# Altium PCB hic v1.0.0.PcbDoc (part 2 of 2)
Units mm, origin at the board's own origin, x right, y up, seen from the top; angles counter-clockwise.
Board outline 54.61 x 86.36 mm, 4 copper layers (Top Layer, GND, PWR, Bottom Layer); 173 components, 96 nets, 602 pads, 171 vias.
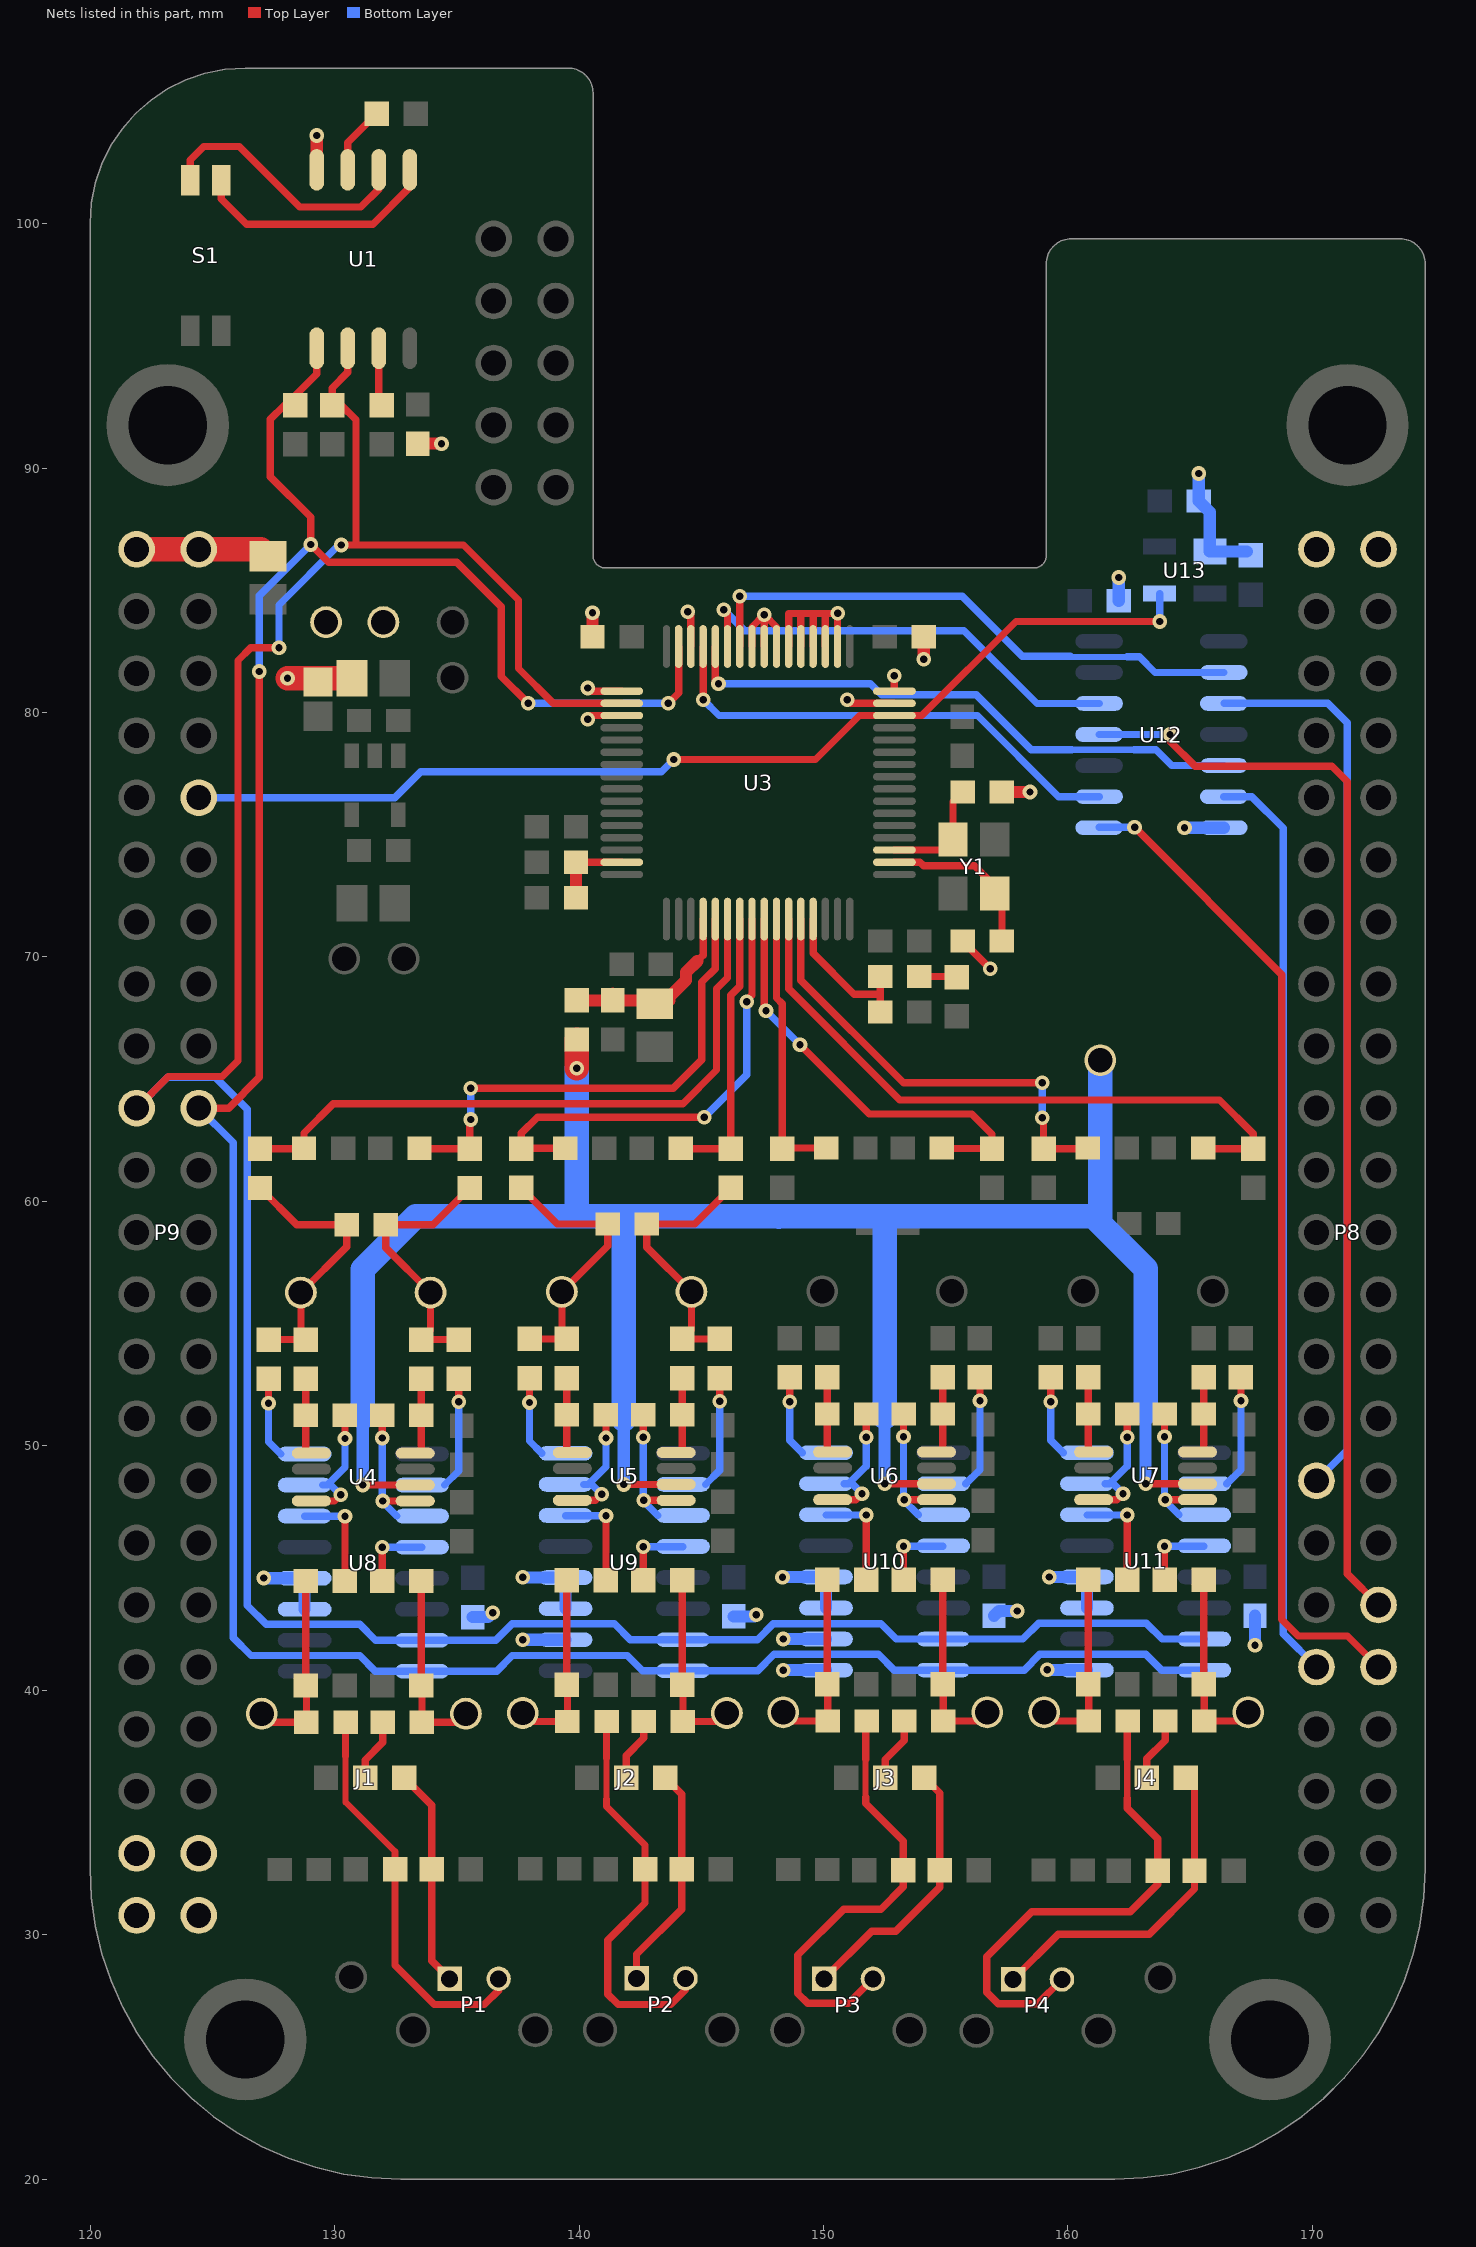
[diagram p4: the nets of this part, all layers, seen from the top]

## Via types
v1: diameter 0.6, hole 0.3, Top Layer to Bottom Layer, 168 vias
v2: diameter 0.6, hole 0.3, Top Layer to Bottom Layer, tented both sides, 3 vias

## Nets (pads, with @x,y where several pads share a name; then routed paths per layer and width w, separated by ;. In a path a pad name is that pad's centre, name@x,y a point inside that pad or via, vN(x,y) a via of type N, cw(c..) or ccw(c..) an arc to the next point about the centre after c; other vN are vias at no path point) (continued)
CHAN3.N: C30.1 R9.1 R19.2 R20.2 TP9.1 | length 11
  Top Layer w0.3: R9.1@137.636,60.552 139.113,59.075 C30.1@141.175,59.075 141.175,58.175 TP9.1@139.3,56.3 R20.2@139.3,54.575 ; R19.2@137.975,54.375 R20.2@139.5,54.375
CHAN3.P: C30.2 R10.1 R21.2 R22.2 TP10.1 | length 10.7
  Top Layer w0.3: R21.2@144.225,54.375 R22.2@145.75,54.375 ; R21.2@144.6,54.75 TP10.1@144.6,56.3 142.775,58.125 C30.2@142.775,59.075 144.734,59.075 R10.1@146.211,60.552
CHAN4.N: C29.1 R7.1 R15.2 R16.2 TP7.1 | length 11
  Top Layer w0.3: R7.1@126.95,60.55 128.45,59.05 C29.1@130.5,59.05 130.5,58.15 TP7.1@128.625,56.275 R16.2@128.625,54.55 ; R15.2@127.3,54.35 R16.2@128.825,54.35
CHAN4.P: C29.2 R8.1 R17.2 R18.2 TP8.1 | length 10.7
  Top Layer w0.3: R17.2@133.55,54.35 R18.2@135.075,54.35 ; R17.2@133.925,54.725 TP8.1@133.925,56.275 132.1,58.1 C29.2@132.1,59.05 134.025,59.05 R8.1@135.525,60.55
CM_BIAS: R6.2 TP25.1 U4.2 U5.2 U6.2 U7.2 | length 95.7
  Top Layer w0.3: v1(131.15,48.4) U4.2@133.3,48.4 ; v1(141.825,48.425) U5.2@143.975,48.425 ; v1(152.5,48.45) U6.2@154.625,48.45 ; v1(163.175,48.45) U7.2@165.3,48.45
  Top Layer w1: v1(139.9,65.45) R6.2@139.9,66.625
  Bottom Layer w0.5: v1(131.15,48.4) 131.15,51.175 ; v1(141.825,48.425) 141.825,51.075 ; v1(152.5,48.45) 152.5,51.175 ; v1(163.175,48.45) 163.175,51.35
  Bottom Layer w1: 131.15,51.175 131.15,57.225 133.325,59.4 148.15,59.4 ; 139.9,59.4 v1(139.9,65.45) ; 141.825,51.075 141.825,59.35 ; 148.175,59.375 148.15,59.4 ; 152.5,51.175 152.5,59.318 ; 161.025,59.4 163.175,57.25 163.175,51.35 ; TP25.1@161.325,65.775 161.325,59.4 148.15,59.4
DAI_ADC.BCLK: U3.28 U12.5 | length 23.6
  Top Layer w0.3: U3.28@145.575,82.7 145.575,81.304 v1(145.704,81.175)
  Bottom Layer w0.25: 160.15,78.475 162.7,78.475
  Bottom Layer w0.3: v1(145.704,81.175) 151.925,81.175 152.375,80.725 156.25,80.725 158.5,78.475 160.15,78.475 ; 162.7,78.475 163.6,78.475 164.245,77.83 U12.5@166.375,77.83
DAI_ADC.DATA1: U3.27 U12.12 | length 18.5
  Top Layer w0.3: v1(145.925,84.2) 146.075,84.05 U3.27@146.075,82.7
  Bottom Layer w0.3: v1(145.925,84.2) 146.775,83.35 155.75,83.35 158.73,80.37 U12.12@161.275,80.37
DAI_ADC.DATA2: U3.26 U12.2 | length 23.1
  Top Layer w0.3: U3.26@146.575,82.7 v1(146.575,84.75)
  Bottom Layer w0.25: 160.1,82.3 160.125,82.275 162.425,82.275
  Bottom Layer w0.3: v1(146.575,84.75) 155.675,84.75 158.125,82.3 160.1,82.3 ; 162.425,82.275 162.925,82.275 163.56,81.64 U12.2@166.375,81.64
DAI_ADC.WCLK: U3.29 U12.9 | length 20
  Top Layer w0.3: v1(145.075,80.525) U3.29@145.075,82.7
  Bottom Layer w0.3: v1(145.075,80.525) 145.725,79.875 156.3,79.875 159.615,76.56 U12.9@161.275,76.56
GND: C1.1 C2.1 C3.1 C4.2 C5.2 C9.1 C16.1 C61.1 C62.1 C63.1 C64.1 C65.1 C66.1 NT1.1 P8.1 P8.2 P9.1 P9.2 P9.43 P9.44 P9.45 P9.46 R55.1 TP1.1 TP2.1 U1.4 U3.15 U3.16 U3.18 U3.19 U3.20 U3.21 U3.22 U3.23 U3.24 U3.25 U3.30 U3.33 U3.35 U8.11 U8.12 U9.10 U9.11 U9.12 U10.9 U10.10 U10.11 U10.12 U11.9 U11.11 U11.12 U12.7 U13.1 | length 65.3
  Top Layer w0.3: v1(140.35,79.725) 140.35,79.8 140.425,79.875 U3.35@141.75,79.875 ; v1(140.35,81) 140.35,80.925 140.4,80.875 U3.33@141.75,80.875 ; v1(144.45,84.125) 144.575,84 U3.30@144.575,82.7 ; U3.25@147.075,82.7 147.075,83.5 v1(147.575,84) ; U3.24@147.575,82.7 v1(147.575,84) ; U3.23@148.075,82.7 148.075,83.5 v1(147.575,84) ; U3.22@148.575,82.7 148.575,84.047 149.075,84.047 ; U3.21@149.075,82.7 149.075,84.047 ; U3.20@149.575,82.7 149.575,84.047 ; U3.19@150.075,82.7 150.075,84.047 ; U3.18@150.575,82.7 v1@150.575,84.047 ; v1(150.582,84.054) v1@150.575,84.047 ; v1(150.975,80.525) 151.125,80.375 U3.15@152.9,80.375 ; U3.16@152.9,80.875 v1(152.9,81.5) ; C16.1@155.7,70.65 v1(156.825,69.525) ; 149.075,84.047 149.575,84.047 ; 149.575,84.047 150.075,84.047 ; 150.075,84.047 v1@150.575,84.047
  Top Layer w0.5: U1.4@129.27,102.2 v1(129.27,103.605) ; C1.1@133.4,91 v1(134.375,91) ; C2.1@140.55,83.1 v1(140.55,84.075) ; v1(154.1,82.175) C3.1@154.1,83.1 ; C9.1@157.3,76.75 v1(158.45,76.75)
  Top Layer w1: P9.1@121.905,86.675 P9.2@124.445,86.675 C4.2@126.986,86.675 ; v1(128.075,81.4) C5.2@130.714,81.4
  Bottom Layer w0.3: v1(150.582,84.054) v1@150.582,84.168
  Bottom Layer w0.5: v1(127.1,44.6) 127.11,44.59 U8.12@128.775,44.59 U8.11@128.775,43.32 ; C61.1@135.65,43 136.275,43 136.475,43.2 v1(136.475,43.175) ; v1(137.7,42.075) U9.10@139.45,42.075 ; v1(137.7,44.625) 137.71,44.615 U9.12@139.45,44.615 U9.11@139.45,43.345 ; C62.1@146.325,43.025 147.175,43.025 v1(147.25,43.1) ; v1(148.325,44.625) 148.34,44.64 U10.12@150.1,44.64 U10.11@150.1,43.37 ; v1(148.35,40.825) 148.355,40.83 U10.9@150.1,40.83 ; v1(148.35,42.1) U10.10@150.1,42.1 ; C63.1@156.975,43.05 157.175,43.25 v1(157.925,43.25) ; v1(159.15,40.85) 159.17,40.83 U11.9@160.775,40.83 ; v1(159.235,44.64) U11.12@160.775,44.64 U11.11@160.775,43.37 ; C65.1@162.075,84.575 v1(162.075,85.525) ; v1(164.765,75.29) U12.7@166.375,75.29 ; v1(165.35,89.775) C66.1@165.35,88.65 165.8,88.2 U13.1@165.8,86.585 R55.1@167.315,86.585 ; v1(167.65,41.85) C64.1@167.65,43.05
I2C2_SCL: P9.19 R3.1 U1.6 U3.34 U8.7 U9.7 U10.7 U11.7 | length 120.5
  Top Layer w0.3: P9.19@121.905,63.815 123.2,65.11 125.41,65.11 126.05,65.75 126.05,82.125 126.575,82.65 v1(127.725,82.65) ; v1(130.275,86.85) 135.275,86.85 137.525,84.6 137.525,81.8 138.95,80.375 U3.34@141.75,80.375 ; U1.6@130.54,94.9 130.54,93.915 129.9,93.275 R3.1@129.9,92.575 130.275,92.575 130.875,91.975 130.875,86.85
  Bottom Layer w0.3: P9.19@121.905,63.815 123.165,65.075 125.125,65.075 126.425,63.775 126.425,43.475 127.2,42.7 131.025,42.7 131.675,42.05 U8.7@133.575,42.05 136.6,42.05 137.275,42.725 141.45,42.725 142.1,42.075 U9.7@144.25,42.075 147.3,42.075 147.95,42.725 152.35,42.725 152.975,42.1 U10.7@154.9,42.1 158.15,42.1 158.8,42.75 163.2,42.75 163.85,42.1 U11.7@165.575,42.1 ; v1(127.725,82.65) 127.725,84.4 130.175,86.85 v1(130.275,86.85)
I2C2_SDA: P9.20 R2.1 U1.5 U3.31 U8.8 U9.8 U10.8 U11.8 | length 120.7
  Top Layer w0.3: P9.20@124.445,63.815 125.665,63.815 126.925,65.075 v1(126.925,81.675) ; R2.1@128.4,92.575 127.95,92.575 127.375,92 127.375,89.65 129.025,88 v1(129.025,86.875) 129.75,86.15 135,86.15 136.825,84.325 136.825,81.475 v1(137.925,80.375) ; R2.1@128.4,92.975 129.27,93.845 U1.5@129.27,94.9 ; v1(143.65,80.375) 144.075,80.8 U3.31@144.075,82.7
  Bottom Layer w0.3: P9.20@124.445,63.815 125.85,62.41 125.85,42.156 126.581,41.425 131.025,41.425 131.67,40.78 U8.8@133.575,40.78 136.63,40.78 137.275,41.425 141.975,41.425 142.595,40.805 U9.8@144.25,40.805 147.305,40.805 147.975,41.475 152.25,41.475 152.895,40.83 U10.8@154.9,40.83 158.205,40.83 158.85,41.475 163.185,41.475 163.83,40.83 U11.8@165.575,40.83 ; v1(126.925,81.675) 126.925,84.775 v1(129.025,86.875) ; v1(137.925,80.375) v1(143.65,80.375)
LOOP_FILTER: C17.1 C18.1 U3.61 | length 6.3
  Top Layer w0.3: U3.61@149.575,71.55 149.575,70.15 151.25,68.475 152.3,68.475 152.325,68.5 C18.1@152.325,69.2 ; C17.1@152.325,67.75 152.325,68.45
MCASP0_ACLKX: P8.37 U12.6 | length 37.8
  Bottom Layer w0.3: U12.6@166.375,76.56 167.515,76.56 168.8,75.275 168.8,42.32 P8.37@170.165,40.955
MCASP0_AXR0: P8.36 U12.11 | length 45
  Top Layer w0.3: v1@164.175,78.825 165.2,77.8 170.8,77.8 171.425,77.175 171.425,44.775 P8.36@172.705,43.495
  Bottom Layer w0.3: U12.11@161.275,79.1 v1(164.175,79.1)
MCASP0_AXR1: P8.31 U12.3 | length 36.9
  Bottom Layer w0.3: U12.3@166.38,80.375 170.625,80.375 171.425,79.575 171.425,49.835 P8.31@170.165,48.575
MCASP0_FSX: P8.38 U12.8 | length 41.1
  Top Layer w0.3: v1(162.725,75.3) 168.75,69.275 168.75,42.9 169.425,42.225 171.435,42.225 P8.38@172.705,40.955
  Bottom Layer w0.3: U12.8@161.285,75.3 v1(162.725,75.3)
MIC1.N: J3.3 P3.1 R52.2 | length 11
  Top Layer w0.3: P3.1@150.022,28.2 151.972,30.15 152.95,30.15 154.75,31.95 R52.2@154.75,32.65 154.75,35.8 J3.3@154.125,36.425
MIC1.P: C53.2 P3.2 R51.1 | length 18.1
  Top Layer w0.25: 151.725,35.625 151.725,37.175
  Top Layer w0.3: 151.725,35.625 151.725,35.375 153.262,33.838 R51.1@153.262,32.649 153.262,31.962 152.35,31.05 150.825,31.05 148.95,29.175 148.95,27.6 149.35,27.2 151.022,27.2 P3.2@152.022,28.2 ; 151.725,37.175 C53.2@151.725,38.7
MIC2.N: J4.3 P4.1 R54.2 | length 13.2
  Top Layer w0.3: P4.1@157.755,28.176 159.604,30.025 163.325,30.025 165.175,31.875 R54.2@165.175,32.625 J4.3@165.175,36.075
MIC2.P: C55.2 P4.2 R53.1 | length 20.6
  Top Layer w0.25: 162.425,35.6 162.425,37.175
  Top Layer w0.3: P4.2@159.755,28.176 158.754,27.175 157.15,27.175 156.675,27.65 156.675,29.1 158.525,30.95 162.55,30.95 163.675,32.075 R53.1@163.675,32.625 163.675,33.925 162.425,35.175 162.425,35.6 ; 162.425,37.175 162.425,38.725 C55.2@162.45,38.75
MIC3.N: J2.3 P2.1 R50.2 | length 9.3
  Top Layer w0.3: P2.1@142.354,28.218 142.354,29.204 144.2,31.05 R50.2@144.2,32.675 144.2,35.75 J2.3@143.525,36.425
MIC3.P: C51.2 P2.2 R49.1 | length 16.5
  Top Layer w0.25: 141.125,35.55 141.125,37.225
  Top Layer w0.3: 141.125,35.55 141.125,35.25 142.7,33.675 R49.1@142.7,32.675 142.7,31.3 141.175,29.775 141.175,27.575 141.6,27.15 143.75,27.15 144.354,27.754 P2.2@144.354,28.218 ; 141.125,37.225 C51.2@141.125,38.725
MIC4.N: J1.3 P1.1 R48.2 | length 9
  Top Layer w0.3: J1.3@132.85,36.425 133.975,35.3 R48.2@133.975,32.675 133.975,28.935 P1.1@134.709,28.2
MIC4.P: C49.2 P1.2 R47.1 | length 16.4
  Top Layer w0.25: 130.45,37.3 130.45,35.425 132.475,33.4
  Top Layer w0.3: 130.45,37.3 C49.2@130.45,38.7 ; 132.475,33.4 R47.1@132.475,32.675 132.475,28.75 134.075,27.15 136.125,27.15 136.709,27.734 P1.2@136.709,28.2
NetC9_2: C9.2 U3.3 Y1.1 | length 4.7
  Top Layer w0.3: U3.3@152.9,74.375 154.875,74.375 Y1.1@155.3,74.8 155.3,76.35 C9.2@155.7,76.75
NetC12_2: C12.2 C13.1 U3.47 | length 3.3
  Top Layer w0.3: C12.2@139.875,73.875 U3.47@141.75,73.875
  Top Layer w0.5: C13.1@139.875,72.425 C12.2@139.875,73.875
NetC16_2: C16.2 U3.2 Y1.2 | length 6.9
  Top Layer w0.3: U3.2@152.9,73.875 153.95,73.875 154.1,73.725 156.175,73.725 157,72.9 Y1.2@157,72.6 157.3,72.3 C16.2@157.3,70.65
NetC18_2: C18.2 R5.1 | length 1.5
  Top Layer w0.3: C18.2@153.925,69.2 R5.1@155.425,69.2
NetC19_2: C19.2 C20.2 R6.1 U3.52 | length 7.1
  Top Layer w0.3: C20.2@141.375,68.225 C20.2@141.375,68.6 ; 144.99,69.99 145.075,70.075 U3.52@145.075,71.55
  Top Layer w0.5: R6.1@139.9,68.225 C20.2@141.375,68.225 C19.2@142.961,68.225 ; C19.2@143.7,68.225 143.7,68.375 144.375,69.05 144.375,69.375 144.84,69.84
NetC33_1: C33.1 R16.1 U4.5 | length 2.8
  Top Layer w0.3: 128.825,49.925 R16.1@128.825,52.75
NetC33_2: C33.2 U4.8 U8.15 | length 5.2
  Top Layer w0.3: U4.8@129.05,47.75 130,47.75 v1(130.25,48) ; v1(130.425,50.3) C33.2@130.425,51.25
  Bottom Layer w0.3: U8.15@129.523,48.4 129.7,48.4 130.425,49.125 v1(130.425,50.3) ; U8.15@129.85,48.4 v1(130.25,48)
NetC34_1: C34.1 R17.1 U4.4 | length 2.8
  Top Layer w0.3: 133.55,49.95 R17.1@133.55,52.75
NetC34_2: C34.2 U4.1 U8.3 | length 5.7
  Top Layer w0.3: v1(131.95,50.325) C34.2@131.95,51.25 ; v1(131.975,47.75) U4.1@133.3,47.75
  Bottom Layer w0.3: v1(131.95,50.325) 131.95,47.725 U8.3@132.545,47.13
NetC36_1: C36.1 R20.1 U5.5 | length 2.8
  Top Layer w0.3: 139.5,49.95 R20.1@139.5,52.775
NetC36_2: C36.2 U5.8 U9.15 | length 5.2
  Top Layer w0.3: U5.8@139.725,47.775 140.675,47.775 v1(140.925,48.025) ; v1(141.1,50.325) C36.2@141.1,51.275
  Bottom Layer w0.3: U9.15@140.198,48.425 140.375,48.425 141.1,49.15 v1(141.1,50.325) ; U9.15@140.525,48.425 v1(140.925,48.025)
NetC37_1: C37.1 R21.1 U5.4 | length 2.8
  Top Layer w0.3: 144.225,49.975 R21.1@144.225,52.775
NetC37_2: C37.2 U5.1 U9.3 | length 5.7
  Top Layer w0.3: v1(142.625,50.35) C37.2@142.625,51.275 ; v1(142.65,47.775) U5.1@143.975,47.775
  Bottom Layer w0.3: v1(142.625,50.35) 142.625,47.75 U9.3@143.22,47.155
NetC39_1: C39.1 R24.1 U6.5 | length 2.8
  Top Layer w0.3: 150.15,49.975 R24.1@150.15,52.8
NetC39_2: C39.2 U6.8 U10.15 | length 5.2
  Top Layer w0.3: U6.8@150.375,47.8 151.325,47.8 v1(151.575,48.05) ; v1(151.75,50.35) C39.2@151.75,51.3
  Bottom Layer w0.3: U10.15@150.848,48.45 151.025,48.45 151.75,49.175 v1(151.75,50.35) ; U10.15@151.175,48.45 v1(151.575,48.05)
NetC40_1: C40.1 R25.1 U6.4 | length 2.8
  Top Layer w0.3: 154.875,50 R25.1@154.875,52.8
NetC40_2: C40.2 U6.1 U10.3 | length 5.7
  Top Layer w0.3: v1(153.275,50.375) C40.2@153.275,51.3 ; v1(153.3,47.8) U6.1@154.625,47.8
  Bottom Layer w0.3: v1(153.275,50.375) 153.275,47.775 U10.3@153.87,47.18
NetC42_1: C42.1 R28.1 U7.5 | length 2.8
  Top Layer w0.3: 160.825,49.975 R28.1@160.825,52.8
NetC42_2: C42.2 U7.8 U11.15 | length 5.2
  Top Layer w0.3: U7.8@161.05,47.8 162,47.8 v1(162.25,48.05) ; v1(162.425,50.35) C42.2@162.425,51.3
  Bottom Layer w0.3: U11.15@161.523,48.45 161.7,48.45 162.425,49.175 v1(162.425,50.35) ; U11.15@161.85,48.45 v1(162.25,48.05)
NetC43_1: C43.1 R29.1 U7.4 | length 2.8
  Top Layer w0.3: 165.55,50 R29.1@165.55,52.8
NetC43_2: C43.2 U7.1 U11.3 | length 5.7
  Top Layer w0.3: v1(163.95,50.375) C43.2@163.95,51.3 ; v1(163.975,47.8) U7.1@165.3,47.8
  Bottom Layer w0.3: v1(163.95,50.375) 163.95,47.775 U11.3@164.545,47.18
NetC49_1: C49.1 R31.1 R39.2 TP19.1 | length 7.2
  Top Layer w0.3: TP19.1@127.375,38.7 C49.1@128.85,38.7 R39.2@128.85,40.175 ; R39.2@128.825,40.2 R31.1@128.825,44.475
NetC50_1: C50.1 R32.1 R40.2 TP20.1 | length 7.2
  Top Layer w0.3: R40.2@133.55,40.2 R32.1@133.55,44.475 ; R40.2@133.575,40.175 C50.1@133.575,38.7 TP20.1@135.025,38.7
NetC50_2: C50.2 J1.2 | length 2.6
  Top Layer w0.3: J1.2@131.25,36.425 131.25,37.15 131.975,37.875 C50.2@131.975,38.7
NetC51_1: C51.1 R33.1 R41.2 TP21.1 | length 7.2
  Top Layer w0.3: TP21.1@138.05,38.725 C51.1@139.525,38.725 R41.2@139.525,40.2 ; R41.2@139.5,40.225 R33.1@139.5,44.5
NetC52_1: C52.1 R34.1 R42.2 TP22.1 | length 7.2
  Top Layer w0.3: R42.2@144.225,40.225 R34.1@144.225,44.5 ; R42.2@144.25,40.2 C52.1@144.25,38.725 TP22.1@145.7,38.725
NetC52_2: C52.2 J2.2 | length 2.6
  Top Layer w0.3: J2.2@141.925,36.425 141.925,37.325 142.65,38.05 C52.2@142.65,38.725
NetC53_1: C53.1 R35.1 R43.2 TP15.1 | length 7.2
  Top Layer w0.3: TP15.1@148.7,38.75 C53.1@150.175,38.75 R43.2@150.175,40.225 ; R43.2@150.15,40.25 R35.1@150.15,44.525
NetC54_1: C54.1 R36.1 R44.2 TP16.1 | length 7.2
  Top Layer w0.3: R44.2@154.875,40.25 R36.1@154.875,44.525 ; R44.2@154.9,40.225 C54.1@154.9,38.75 TP16.1@156.35,38.75
NetC54_2: C54.2 J3.2 | length 2.6
  Top Layer w0.3: J3.2@152.525,36.425 152.525,37.175 153.3,37.95 C54.2@153.3,38.75
NetC55_1: C55.1 R37.1 R45.2 TP17.1 | length 7.2
  Top Layer w0.3: TP17.1@159.375,38.75 C55.1@160.85,38.75 R45.2@160.85,40.225 ; R45.2@160.825,40.25 R37.1@160.825,44.525
NetC56_1: C56.1 R38.1 R46.2 TP18.1 | length 7.2
  Top Layer w0.3: R46.2@165.55,40.25 R38.1@165.55,44.525 ; R46.2@165.575,40.225 C56.1@165.575,38.75 TP18.1@167.025,38.75
NetC56_2: C56.2 J4.2 | length 2.6
  Top Layer w0.3: J4.2@163.225,36.425 163.225,37.2 163.975,37.95 C56.2@163.975,38.75
NetR1_1: R1.1 U1.3 | length 2.8
  Top Layer w0.3: U1.3@130.54,102.2 130.54,103.315 R1.1@131.725,104.5
NetR4_1: R4.1 U1.7 | length 2.2
  Top Layer w0.3: R4.1@131.81,92.69 U1.7@131.81,94.9
NetR15_1: R15.1 U8.16 | length 3.3
  Top Layer w0.3: v1(127.3,51.75) R15.1@127.3,52.75
  Bottom Layer w0.3: v1(127.3,51.75) 127.3,50.175 U8.16@127.805,49.67
NetR18_1: R18.1 U8.2 | length 4.6
  Top Layer w0.3: v1(135.075,51.8) R18.1@135.075,52.75
  Bottom Layer w0.3: U8.2@134.5,48.4 135.075,48.975 v1(135.075,51.8)
NetR19_1: R19.1 U9.16 | length 3.3
  Top Layer w0.3: v1(137.975,51.775) R19.1@137.975,52.775
  Bottom Layer w0.3: v1(137.975,51.775) 137.975,50.2 U9.16@138.48,49.695
NetR22_1: R22.1 U9.2 | length 4.6
  Top Layer w0.3: v1(145.75,51.825) R22.1@145.75,52.775
  Bottom Layer w0.3: U9.2@145.175,48.425 145.75,49 v1(145.75,51.825)
NetR23_1: R23.1 U10.16 | length 3.3
  Top Layer w0.3: v1(148.625,51.8) R23.1@148.625,52.8
  Bottom Layer w0.3: v1(148.625,51.8) 148.625,50.225 U10.16@149.13,49.72
NetR26_1: R26.1 U10.2 | length 4.6
  Top Layer w0.3: v1(156.4,51.85) R26.1@156.4,52.8
  Bottom Layer w0.3: U10.2@155.825,48.45 156.4,49.025 v1(156.4,51.85)
NetR27_1: R27.1 U11.16 | length 3.3
  Top Layer w0.3: v1(159.3,51.8) R27.1@159.3,52.8
  Bottom Layer w0.3: v1(159.3,51.8) 159.3,50.225 U11.16@159.805,49.72
NetR30_1: R30.1 U11.2 | length 4.6
  Top Layer w0.3: v1(167.075,51.85) R30.1@167.075,52.8
  Bottom Layer w0.3: U11.2@166.5,48.45 167.075,49.025 v1(167.075,51.85)
NetR31_2: R31.2 U8.14 | length 4.3
  Top Layer w0.3: R31.2@130.425,44.475 v1(130.425,47.125)
  Bottom Layer w0.3: U8.14@128.78,47.125 v1(130.425,47.125)
NetR32_2: R32.2 U8.4 | length 3
  Top Layer w0.3: R32.2@131.95,44.475 v1(131.95,45.85)
  Bottom Layer w0.3: v1(131.95,45.85) U8.4@133.565,45.85
NetR33_2: R33.2 U9.14 | length 4.3
  Top Layer w0.3: R33.2@141.1,44.5 v1(141.1,47.15)
  Bottom Layer w0.3: U9.14@139.455,47.15 v1(141.1,47.15)
NetR34_2: R34.2 U9.4 | length 3
  Top Layer w0.3: R34.2@142.625,44.5 v1(142.625,45.875)
  Bottom Layer w0.3: v1(142.625,45.875) U9.4@144.24,45.875
NetR35_2: R35.2 U10.14 | length 4.3
  Top Layer w0.3: R35.2@151.75,44.525 v1(151.75,47.175)
  Bottom Layer w0.3: U10.14@150.105,47.175 v1(151.75,47.175)
NetR36_2: R36.2 U10.4 | length 3
  Top Layer w0.3: R36.2@153.275,44.525 v1(153.275,45.9)
  Bottom Layer w0.3: v1(153.275,45.9) U10.4@154.89,45.9
NetR37_2: R37.2 U11.14 | length 4.3
  Top Layer w0.3: R37.2@162.425,44.525 v1(162.425,47.175)
  Bottom Layer w0.3: U11.14@160.78,47.175 v1(162.425,47.175)
NetR38_2: R38.2 U11.4 | length 3
  Top Layer w0.3: R38.2@163.95,44.525 v1(163.95,45.9)
  Bottom Layer w0.3: v1(163.95,45.9) U11.4@165.565,45.9
NetS1_3: S1.3 U1.1 | length 10.3
  Top Layer w0.3: S1.3@125.37,101.775 125.37,101.005 126.4,99.975 131.575,99.975 133.08,101.48 U1.1@133.08,102.2
NetS1_4: S1.4 U1.2 | length 10.9
  Top Layer w0.3: S1.4@124.1,101.775 124.1,102.6 124.65,103.15 126.1,103.15 128.575,100.675 131.075,100.675 131.81,101.41 U1.2@131.81,102.2
"OP.N_U_adc filter1": C21.1 R7.2 U3.54 | length 27.1
  Top Layer w0.3: R7.2@126.95,62.15 C21.1@128.725,62.15 ; C21.1@128.75,62.6 C21.1@128.75,62.175 128.75,62.8 129.95,64 144.25,64 145.625,65.375 145.625,68.7 146.075,69.15 U3.54@146.075,71.55
"OP.N_U_adc filter2": C23.1 R9.2 U3.56 | length 19.1
  Top Layer w0.3: R9.2@137.636,62.152 137.636,62.786 138.3,63.45 v1(145.125,63.45) ; R9.2@137.661,62.177 C23.1@139.436,62.177 ; v1(146.864,68.164) 146.8,68.164 v1@147.025,68.389 ; 147.075,68.439 U3.56@147.075,71.55
  Bottom Layer w0.3: v1(145.125,63.45) 146.864,65.189 v1(146.864,68.164)
"OP.N_U_adc filter3": C25.1 R11.2 U3.58 | length 11.3
  Top Layer w0.3: U3.58@148.075,71.55 148.075,68.325 148.318,68.082 R11.2@148.318,62.164 ; R11.2@148.343,62.189 C25.1@150.118,62.189
"OP.N_U_adc filter4": C27.1 R13.2 U3.60 | length 18.6
  Top Layer w0.3: U3.60@149.075,71.55 149.075,69.05 153.275,64.85 v1(158.95,64.85) ; v1(158.95,63.425) 159.001,63.374 R13.2@159.001,62.157 C27.1@160.776,62.157
  Bottom Layer w0.3: v1(158.95,63.425) v1(158.95,64.85)
"OP.P_U_adc filter1": C22.2 R8.2 U3.53 | length 20.4
  Top Layer w0.3: C22.2@133.5,62.15 R8.2@135.525,62.15 135.525,63.3 v1(135.575,63.35) ; v1(135.575,64.625) 143.85,64.625 145.025,65.8 145.025,68.975 145.575,69.525 U3.53@145.575,71.55
  Bottom Layer w0.3: v1(135.575,63.35) v1(135.575,64.625)
"OP.P_U_adc filter2": C24.2 R10.2 U3.55 | length 11.6
  Top Layer w0.3: C24.2@144.186,62.152 R10.2@146.211,62.152 146.211,68.436 146.575,68.8 U3.55@146.575,71.55
"OP.P_U_adc filter3": C26.2 R12.2 U3.57 | length 17.7
  Top Layer w0.3: U3.57@147.575,71.55 147.575,67.875 v1(147.65,67.8) ; v1(149.038,66.412) 151.875,63.575 156.068,63.575 156.893,62.75 R12.2@156.893,62.164 C26.2@154.868,62.164
  Bottom Layer w0.3: v1(147.65,67.8) v1(149.038,66.412)
"OP.P_U_adc filter4": C28.2 R14.2 U3.59 | length 26.9
  Top Layer w0.3: U3.59@148.575,71.55 148.575,68.7 153.125,64.15 166.2,64.15 167.576,62.774 R14.2@167.576,62.157 C28.2@165.551,62.157
R\S\T\: P9.10 U3.14 U13.3 | length 43.4
  Top Layer w0.3: v1(143.875,78.075) 149.675,78.075 151.475,79.875 U3.14@152.9,79.875 154.025,79.875 157.875,83.725 v1(163.75,83.725)
  Bottom Layer w0.3: P9.10@124.445,76.515 132.465,76.515 133.525,77.575 143.375,77.575 v1(143.875,78.075) ; v1(163.75,83.725) U13.3@163.75,84.865
pads on no net: P1. P2. P3. P4. P8.3 P8.4 P8.5 P8.6 P8.7 P8.8 P8.9 P8.10 P8.11 P8.12 P8.13 P8.14 P8.15 P8.16 P8.17 P8.18 P8.19 P8.20 P8.21 P8.22 P8.23 P8.24 P8.25 P8.26 P8.27 P8.28 P8.29 P8.30 P8.32 P8.33 P8.34 P8.35 P8.39 P8.40 P8.41 P8.42 P8.43 P8.44 P8.45 P8.46 P9.5 P9.6 P9.9 P9.11 P9.12 P9.13 P9.14 P9.15 P9.16 P9.17 P9.18 P9.21 P9.22 P9.23 P9.24 P9.25 P9.26 P9.27 P9.28 P9.29 P9.30 P9.31 P9.32 P9.33 P9.34 P9.35 P9.36 P9.37 P9.38 P9.39 P9.40 P9.41 P9.42 P11.1 P11.2 P11.3 P11.4 P11.5 P11.6 P11.7 P11.8 P11.9 P11.10 U2.4 U3.6 U3.7 U3.8 U3.9 U3.10 U3.11 U3.12 U3.13 U3.36 U3.37 U3.38 U3.39 U3.40 U3.41 U3.42 U3.43 U3.49 U3.50 U3.63 U3.64 U8.1 U8.13 U9.1 U9.13 U10.1 U10.13 U11.1 U11.13 Y1.

## Polygon pours and split planes (outlines as drawn)
GND on GND (split plane): 139.657,105.842 139.752,105.813 139.84,105.766 139.917,105.703 139.98,105.626 140.027,105.538 140.056,105.443 140.065,105.356 140.064,105.344 140.064,86.421 140.064,86.413 140.073,86.288 140.098,86.157 140.141,86.031 140.2,85.912 140.274,85.801 140.362,85.701 140.462,85.613 140.573,85.539 140.692,85.48 140.818,85.437 140.949,85.412 141.073,85.403 141.082,85.403 158.608,85.403 158.617,85.403 158.741,85.412 158.872,85.437 158.998,85.48 159.117,85.539 159.228,85.613 159.328,85.701 159.416,85.801 159.49,85.912 159.549,86.031 159.591,86.157 159.617,86.288 159.626,86.413 159.626,86.421 159.626,98.359 159.625,98.371 159.634,98.458 159.663,98.553 159.71,98.641 159.773,98.718 159.85,98.781 159.938,98.828 160.033,98.857 160.12,98.866 160.132,98.865 173.594,98.865 173.606,98.866 173.693,98.857 173.788,98.828 173.876,98.781 173.953,98.718 174.016,98.641 174.063,98.553 174.092,98.458 174.101,98.371 174.1,98.359 174.1,32.712 174.047,31.575 173.891,30.46 173.634,29.364 173.276,28.297 172.821,27.267 172.273,26.283 171.637,25.354 170.918,24.488 170.122,23.692 169.255,22.973 168.327,22.337 167.343,21.789 166.313,21.334 165.246,20.976 164.15,20.719 163.035,20.563 161.898,20.51 132.712,20.51 131.575,20.563 130.46,20.719 129.364,20.976 128.297,21.334 127.267,21.789 126.283,22.337 125.354,22.973 124.488,23.692 123.692,24.488 122.973,25.354 122.337,26.283 121.789,27.267 121.334,28.297 120.976,29.364 120.719,30.46 120.563,31.575 120.51,32.712 120.51,99.993 120.561,100.772 120.71,101.521 120.956,102.244 121.294,102.929 121.718,103.564 122.222,104.138 122.796,104.642 123.431,105.066 124.116,105.404 124.839,105.649 125.588,105.798 126.367,105.85 139.558,105.85 139.57,105.851
AGND on GND (split plane): 175 vertices, not listed, extent 126.453,22.69 168.598,79.923
+3.3 on PWR (split plane): 139.657,105.842 139.752,105.813 139.84,105.766 139.917,105.703 139.98,105.626 140.027,105.538 140.056,105.443 140.065,105.356 140.064,105.344 140.064,86.421 140.064,86.413 140.073,86.288 140.098,86.157 140.141,86.031 140.2,85.912 140.274,85.801 140.362,85.701 140.462,85.613 140.573,85.539 140.692,85.48 140.818,85.437 140.949,85.412 141.073,85.403 141.082,85.403 158.608,85.403 158.617,85.403 158.741,85.412 158.872,85.437 158.998,85.48 159.117,85.539 159.228,85.613 159.328,85.701 159.416,85.801 159.49,85.912 159.549,86.031 159.591,86.157 159.617,86.288 159.626,86.413 159.626,86.421 159.626,98.359 159.625,98.371 159.634,98.458 159.663,98.553 159.71,98.641 159.773,98.718 159.85,98.781 159.938,98.828 160.033,98.857 160.12,98.866 160.132,98.865 173.594,98.865 173.606,98.866 173.693,98.857 173.788,98.828 173.876,98.781 173.953,98.718 174.016,98.641 174.063,98.553 174.092,98.458 174.101,98.371 174.1,98.359 174.1,32.712 174.047,31.575 173.891,30.46 173.634,29.364 173.276,28.297 172.821,27.267 172.273,26.283 171.637,25.354 170.918,24.488 170.122,23.692 169.255,22.973 168.327,22.337 167.343,21.789 166.313,21.334 165.246,20.976 164.15,20.719 163.035,20.563 161.898,20.51 132.712,20.51 131.575,20.563 130.46,20.719 129.364,20.976 128.297,21.334 127.267,21.789 126.283,22.337 125.354,22.973 124.488,23.692 123.692,24.488 122.973,25.354 122.337,26.283 121.789,27.267 121.334,28.297 120.976,29.364 120.719,30.46 120.563,31.575 120.51,32.712 120.51,99.993 120.561,100.772 120.71,101.521 120.956,102.244 121.294,102.929 121.718,103.564 122.222,104.138 122.796,104.642 123.431,105.066 124.116,105.404 124.839,105.649 125.588,105.798 126.367,105.85 139.558,105.85 139.57,105.851
+3.3A on PWR (split plane): 155.198,69.2 155.206,69.135 155.232,69.074 155.272,69.022 157.368,66.925 157.391,66.908 157.42,66.885 157.481,66.86 157.546,66.851 161.867,66.851 163.872,64.847 163.924,64.807 163.985,64.781 164.05,64.773 168.373,64.773 168.373,47.054 166.372,45.053 166.332,45.001 166.306,44.94 166.298,44.875 166.298,41.9 166.306,41.835 166.332,41.774 166.372,41.722 168.598,39.496 168.598,31.804 159.496,22.702 156.477,22.702 156.477,29.321 159.228,32.072 159.268,32.124 159.294,32.185 159.302,32.25 159.302,33.946 160.178,34.822 160.196,34.844 160.218,34.874 160.244,34.935 160.252,35 160.252,45.55 160.244,45.615 160.218,45.676 160.178,45.728 160.126,45.768 160.065,45.794 160,45.802 156.975,45.802 156.91,45.794 156.849,45.768 156.797,45.728 156.757,45.676 156.731,45.615 156.723,45.55 156.723,43.269 156.731,43.203 156.757,43.143 156.797,43.09 156.948,42.939 156.948,38.031 156.948,35.525 156.948,33.454 153.547,30.053 153.507,30.001 153.481,29.94 153.473,29.875 153.473,22.702 149.602,22.702 149.602,45.5 149.594,45.565 149.568,45.626 149.528,45.678 149.476,45.718 149.415,45.744 149.35,45.752 146.075,45.752 146.01,45.744 145.949,45.718 145.897,45.678 145.857,45.626 145.831,45.565 145.823,45.5 145.823,40.15 145.831,40.085 145.857,40.024 145.897,39.972 146.223,39.646 146.223,28.25 146.223,22.702 140.102,22.702 140.102,25.319 140.102,31.056 140.094,31.122 140.068,31.182 140.046,31.212 140.028,31.235 139.702,31.561 139.702,34.325 139.694,34.39 139.668,34.451 139.628,34.503 138.852,35.279 138.852,40.475 138.852,45.5 138.844,45.565 138.818,45.626 138.778,45.678 138.726,45.718 138.665,45.744 138.6,45.752 135.55,45.752 135.485,45.744 135.424,45.718 135.372,45.678 135.332,45.626 135.306,45.565 135.298,45.5 135.298,35.3 135.298,34.7 135.306,34.635 135.332,34.574 135.372,34.522 137.123,32.771 137.123,24.1 137.123,22.677 134.954,22.677 126.452,31.179 126.452,37.696 128.203,39.447 128.243,39.499 128.269,39.56 128.277,39.625 128.277,43.2 128.269,43.265 128.243,43.326 128.203,43.378 126.452,45.129 126.452,62.85 126.452,65.05 126.452,69.546 133.979,77.073 151.175,77.073 151.24,77.081 151.301,77.107 151.353,77.147 154.129,79.923 155.198,79.923

## Other copper
GND (plane layer: these items are gaps in the copper):
  lines w0.5: 126.201,31.099 134.863,22.437 137.525,22.437 137.525,32.75 135.2,35.075 135.2,41.425 135.2,45.025 136.55,45.025 137.025,45.5 138.95,45.5 138.95,34.875 139.875,33.95 139.875,22.437 146.475,22.437 146.475,28.209 146.475,32.4 146.75,32.675 146.75,34.675 146.475,34.95 146.475,39.753 146,40.228 146,45.15 147.325,45.15 147.7,45.525 149.6,45.525 149.6,39.95 149.325,39.675 149.325,22.437 153.725,22.437 153.725,29.85 157.2,33.325 157.2,41.925 156.875,42.25 156.875,45.15 158.2,45.15 158.65,45.6 160.35,45.6 160.35,42.35 160,42 160,37.688 160,35.05 159,34.05 159,32.2 156.25,29.45 156.25,22.437 159.587,22.437 168.85,31.7 168.85,39.125 166.45,41.525 166.45,43.55 168.625,45.725 168.625,65.075 164,65.075 161.972,67.103 157.522,67.103 155.475,69.15 155.475,80.175 153.675,80.175 150.825,77.325 133.875,77.325 126.201,69.651 126.201,47.374 128,45.575 128,43.6 126.201,41.801 126.201,31.099
PWR (plane layer: these items are gaps in the copper):
  lines w0.5: 126.2,31.075 134.85,22.425 137.375,22.425 137.375,24.1 137.375,32.875 135.55,34.7 135.55,35.3 135.55,45.5 138.6,45.5 138.6,40.475 138.6,35.175 139.45,34.325 139.45,31.456 139.85,31.056 139.85,25.319 139.85,22.45 146.475,22.45 146.475,22.5 146.475,28.25 146.475,39.75 146.075,40.15 146.075,45.5 149.35,45.5 149.35,22.45 153.725,22.45 153.725,29.875 157.2,33.35 157.2,35.525 157.2,38.031 157.2,43.044 156.975,43.269 156.975,45.55 160,45.55 160,35 159.05,34.05 159.05,32.25 156.225,29.425 156.225,22.45 159.6,22.45 168.85,31.7 168.85,39.6 166.55,41.9 166.55,44.875 168.625,46.95 168.625,65.025 164.05,65.025 161.971,67.104 157.546,67.104 155.45,69.2 155.45,80.175 154.025,80.175 151.175,77.325 133.875,77.325 126.2,69.65 126.2,65.05 126.2,62.85 126.2,45.025 128.025,43.2 128.025,39.625 126.2,37.8 126.2,31.075

## Silkscreen, mask and mechanical layers (free items; w line width, h text height)
Top Overlay:
  drawing of 77 lines, arcs and shapes, not listed
  text "ID" at 123.95,103.225 h2
  text "HIC" at 163.4,91.907 h4 r90
  text "V 1.0.0" at 165.6,91.907 h2 r90
  text "GND" at 128.9,85.7 h2
  text "3.3V" at 134.1,85.7 h2
  text "5V" at 134.25,78.325 h2
  text "© 2012 JAMES BUCKLEY" at 168,68.175 h1.4 r90
  text "CM BIAS" at 158.3,67.65 h2
  text "3.3A" at 136.125,66.95 h2 r90
  text "AGND" at 128.35,65.45 h2 r90
  text "3-N" at 150.325,57.8 h1.2 r90
  text "2-P" at 144.975,57.775 h1.2 r90
  text "3-P" at 155.625,57.775 h1.2 r90
  text "4-N" at 161,57.775 h1.2 r90
  text "4-P" at 166.325,57.775 h1.2 r90
  text "2-N" at 139.675,57.75 h1.2 r90
  text "1-N" at 129,57.725 h1.2 r90
  text "1-P" at 134.3,57.725 h1.2 r90
  text "4-N PRE" at 159.375,40.575 h1.2 r90
  text "4-P PRE" at 167.775,40.575 h1.2 r90
  text "1-N PRE" at 127.45,40.55 h1.2 r90
  text "3-N PRE" at 148.725,40.55 h1.2 r90
  text "3-P PRE" at 157.075,40.55 h1.2 r90
  text "2-N PRE" at 138.1,40.525 h1.2 r90
  text "2-P PRE" at 146.45,40.525 h1.2 r90
  text "1-P PRE" at 135.75,40.5 h1.2 r90
  text "AGND" at 126.675,29.85 h2
  text "AGND" at 162.75,29.825 h2
  text "IP 1" at 134.325,29.5 h2
  text "IP 2" at 141.825,29.5 h2
  text "IP 3" at 149.5,29.5 h2
  text "IP 4" at 157.2,29.5 h2
Bottom Overlay:
  drawing of 147 lines, arcs and shapes, not listed
  text "MIC INPUTS" at 151.712,33.673 h1.6
  text "1   MIC LOW" at 151.32,31.609 h1.6
  text "2   MIC HIGH" at 151.42,30.009 h1.6
Mechanical 15:
  lines w0.1: 136.6,33.4 136.6,64.3 ; 147.3,33.4 147.3,86 ; 158,33.4 158,64.3
  lines w0.102: 131.2,51.975 131.2,51.975
Mechanical 19:
  the board outline again, w0.025

## Text inside footprints (layer, text, board x,y; h text height)
J1: Top Overlay "1" at 128.1,36.05 h1.2
J2: Top Overlay "1" at 138.825,36.05 h1.2
J3: Top Overlay "1" at 149.4,36.05 h1.2
J4: Top Overlay "1" at 160.125,36.025 h1.2
P1: Top Overlay "JST" at 137.309,22.3 h2 r180; Top Overlay "PA" at 136.809,24.2 h2 r180
P2: Top Overlay "JST" at 144.954,22.318 h2 r180; Top Overlay "PA" at 144.454,24.218 h2 r180
P3: Top Overlay "JST" at 152.622,22.3 h2 r180; Top Overlay "PA" at 152.122,24.2 h2 r180
P4: Top Overlay "JST" at 160.355,22.276 h2 r180; Top Overlay "PA" at 159.855,24.176 h2 r180
S1: Top Overlay "ON" at 123.4,99.325 h2; Top Overlay "1" at 123.3,96.925 h2